# EAGLE board ATmega328P (EAGLE 9.5.2)
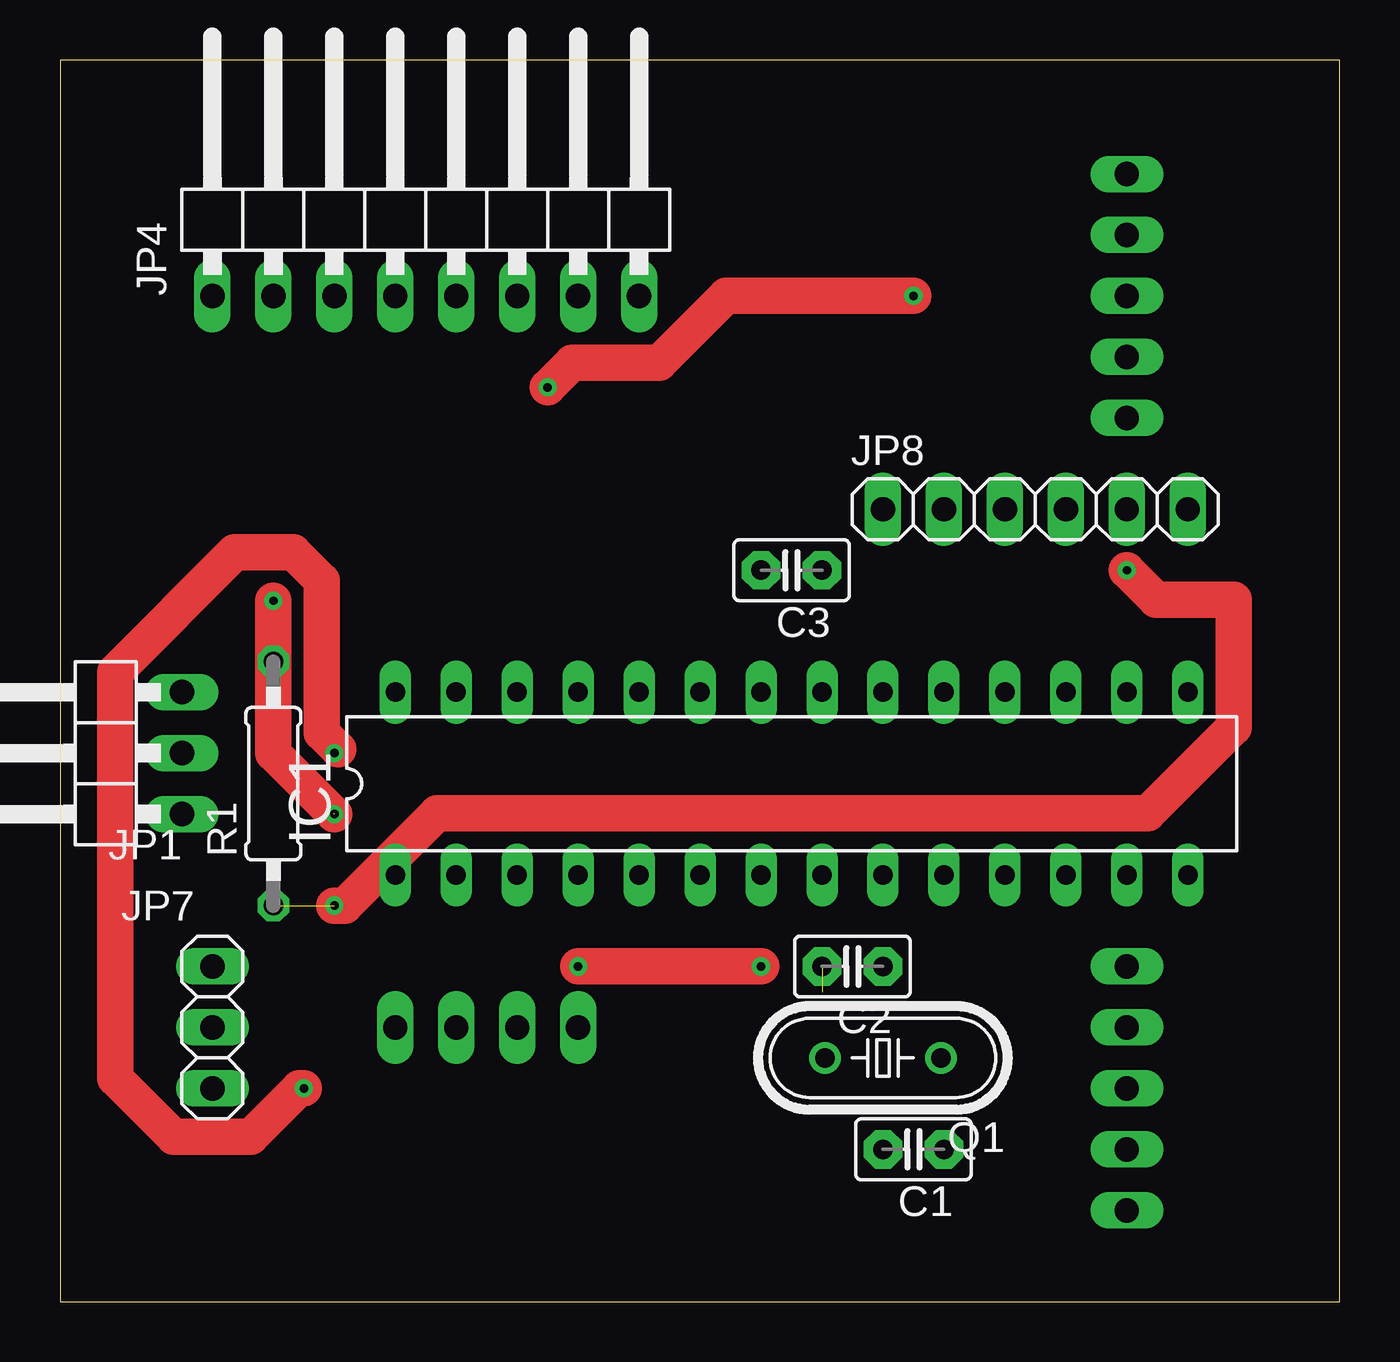
[diagram p0: board, top side]
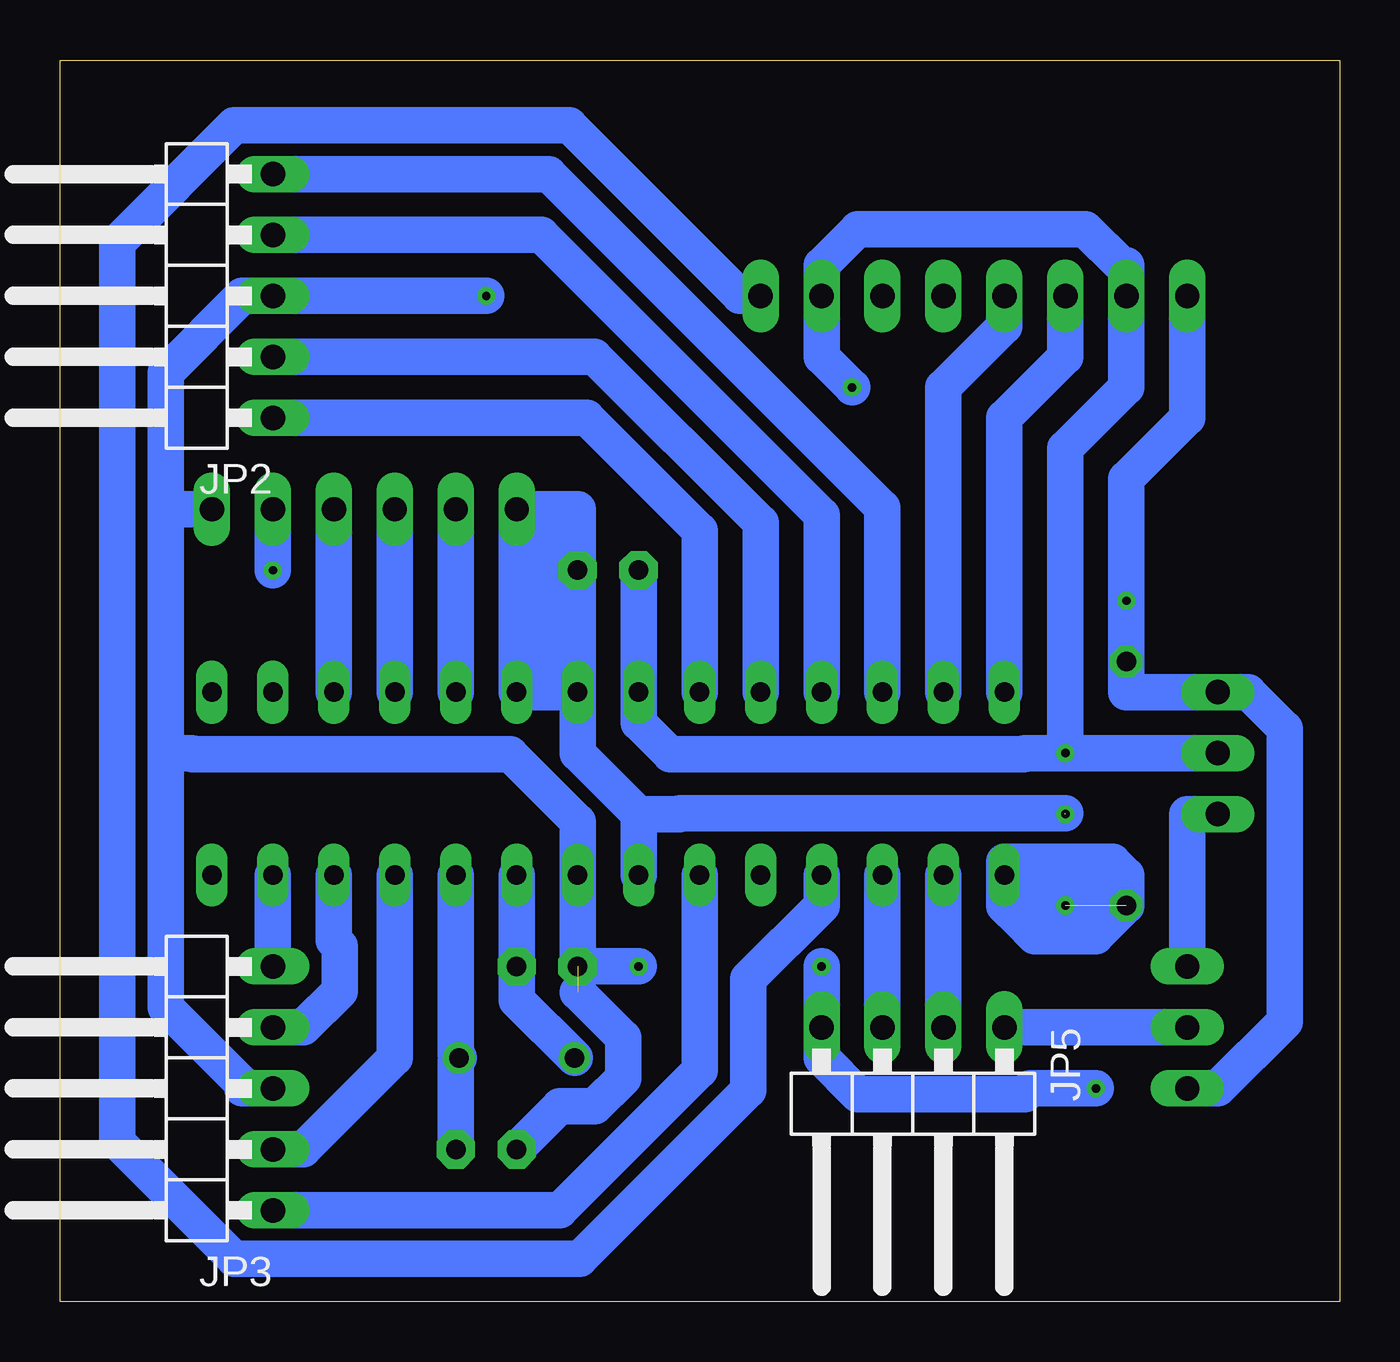
[diagram p1: board, bottom side, seen from below]

Size 53.32 x 51.74 mm. Coordinates in mm from the lower left corner, seen from the top.
Outline: 0,0 53.32,0 53.32,51.74 0,51.74 0,0
Copper layers (1*16): Top 0.035mm / dielectric 1.5mm / Bottom 0.035mm
Design rules "default *": minimum track width 6mil, minimum drill 0.35mm, track to track 0.5mm, track to pad 0.5mm, pad to pad 0.5mm, via to via 0.5mm, smd to smd 0.5mm, copper to edge 40mil, drill to drill 6mil, minimum pad ring 10mil, minimum via ring 8mil, stop-mask expansion 4mil, vias tented up to drill 0mil, thermal gap 10mil

## Footprints (pad centres in the part's own frame; a part is rotated, then mirrored left to right if it is on the bottom)
C2.5-2 = drill 0.813 pad 1.6 octagon: 1 -1.27,0; 2 1.27,0
DIL28-3 = drill 0.813 long: 1 -16.51,-3.81; 2 -13.97,-3.81; 3 -11.43,-3.81; 4 -8.89,-3.81; 5 -6.35,-3.81; 6 -3.81,-3.81; 7 -1.27,-3.81; 8 1.27,-3.81; 9 3.81,-3.81; 10 6.35,-3.81; 11 8.89,-3.81; 12 11.43,-3.81; 13 13.97,-3.81; 14 16.51,-3.81; 15 16.51,3.81; 16 13.97,3.81; 17 11.43,3.81; 18 8.89,3.81; 19 6.35,3.81; 20 3.81,3.81; 21 1.27,3.81; 22 -1.27,3.81; 23 -3.81,3.81; 24 -6.35,3.81; 25 -8.89,3.81; 26 -11.43,3.81; 27 -13.97,3.81; 28 -16.51,3.81
1X03/90 = drill 1.016 long: 1 -2.54,-3.81; 2 0,-3.81; 3 2.54,-3.81
1X05/90 = drill 1.016 long: 1 -5.08,-3.81; 2 -2.54,-3.81; 3 0,-3.81; 4 2.54,-3.81; 5 5.08,-3.81
1X08/90 = drill 1.016 long: 1 -8.89,-3.81; 2 -6.35,-3.81; 3 -3.81,-3.81; 4 -1.27,-3.81; 5 1.27,-3.81; 6 3.81,-3.81; 7 6.35,-3.81; 8 8.89,-3.81
1X04/90 = drill 1.016 long: 1 -3.81,-3.81; 2 -1.27,-3.81; 3 1.27,-3.81; 4 3.81,-3.81
1X03 = drill 1.016 long: 1 -2.54,0; 2 0,0; 3 2.54,0
1X06 = drill 1.016 long: 1 -6.35,0; 2 -3.81,0; 3 -1.27,0; 4 1.27,0; 5 3.81,0; 6 6.35,0
HC49/S = drill 0.813: 1 -2.413,0; 2 2.413,0
0207/10 = drill 0.813 octagon: 1 -5.08,0; 2 5.08,0

## Placement (x,y rotation side)
C1  22pF  [C2.5-2]  35.56,6.35 180 top
C2  22pF  [C2.5-2]  33.02,13.97 180 top
C3  [C2.5-2]  30.48,30.48 180 top
IC1  MEGA8-P  [DIL28-3]  30.48,21.59 0 top
JP1  [1X03/90]  1.27,22.86 90 top
JP2  [1X05/90]  48.26,41.91 90 bottom
JP3  [1X05/90]  48.26,8.89 90 bottom
JP4  [1X08/90]  15.24,45.72 0 top
JP5  [1X04/90]  17.78,7.62 180 bottom
JP7  [1X03]  6.35,11.43 270 top
JP8  [1X06]  40.64,33.02 0 top
Q1  16MHz  [HC49/S]  34.29,10.16 180 top
R1  10k  [0207/10]  8.89,21.59 90 top

## Library data of the parts
C1-C3 = capacitor-wima
IC1 = atmel; OC_FARNELL: unknown; OC_NEWARK: unknown
JP1-JP5 JP7 JP8 = pinhead
Q1 = crystal; OC_FARNELL: 1667008; OC_NEWARK: unknown
R1 = rcl; SPICEPREFIX: R

## Nets
3V3: JP1.1 JP7.1
5V: C3.1 IC1.7 IC1.20 IC1.21 JP1.3 JP4.1 JP7.3 JP8.1 R1.2
A1: IC1.23 JP2.1
A2: IC1.24 JP2.2
B1: IC1.25 JP2.4
B2: IC1.26 JP2.5
C1: IC1.6 JP3.1
C2: IC1.11 JP3.2
D1: IC1.12 JP3.4
D2: IC1.13 JP3.5
GND: C1.2 C2.2 C3.2 IC1.8 IC1.22 JP1.2 JP2.3 JP3.3 JP4.2 JP4.7 JP5.4 JP8.6
INT: IC1.4 JP4.8
N$1: C2.1 IC1.9 Q1.2
N$2: C1.1 IC1.10 Q1.1
N$3: JP5.1 JP7.2
N$4: IC1.18 JP8.3
N$7: IC1.17 JP8.4
N$8: IC1.19 JP8.2
N$9: IC1.1 JP8.5 R1.1
RX: IC1.2 JP5.2
SCL: IC1.28 JP4.3
SDA: IC1.27 JP4.4
TX: IC1.3 JP5.3
XCL: JP4.6
XDA: JP4.5

## Tracks (layer width: path | path; a pad name or v marks a point on that pad's centre or on a via)
3V3
  Bottom 1.524: JP1.1 6.35,20.32 JP7.1
5V  (via drill 0.35)  (1 unrouted)
  Top 1.524: v8.89,29.21 8.89,22.86 v11.43,20.32
  Bottom 1.524: 33.02,25.4 IC1.20 34.29,27.94 | 33.02,25.4 IC1.21 | C3.1 31.75,27.94 | 31.75,27.94 IC1.21 | 34.29,27.94 33.02,27.94 | 33.02,27.94 31.75,27.94 | 33.02,27.94 33.02,25.4 | 34.29,31.75 33.02,31.75 33.02,30.48 | 33.02,30.48 C3.1 | 34.29,27.94 34.29,31.75 | 34.29,31.75 JP8.1 31.75,33.02 C3.1 | 33.02,30.48 33.02,27.94 | IC1.21 31.75,22.86 29.21,20.32 | IC1.7 29.21,20.32 | JP4.1 6.35,36.83 8.89,34.29 v8.89,29.21 R1.2 8.89,25.4 JP1.3 3.81,25.4 2.29,23.88 2.29,11.68 5.08,8.89 JP7.3 | 29.21,20.32 27.51,20.32 27.47,20.36 11.43,20.36
A1
  Bottom 1.524: IC1.23 26.67,32.13 31.37,36.83 JP2.1
A2
  Bottom 1.524: IC1.24 24.13,32.45 31.05,39.37 JP2.2
B1
  Bottom 1.524: IC1.25 21.59,32.77 33.27,44.45 JP2.4
B2
  Bottom 1.524: IC1.26 19.05,33.09 32.95,46.99 JP2.5
C1
  Bottom 1.524: JP3.1 32.5,3.81 26.67,9.64 IC1.6
C2
  Bottom 1.524: JP3.2 43.18,6.35 39.37,10.16 IC1.11
D1
  Bottom 1.524: JP3.4 43.18,11.43 41.66,12.95 41.66,14.81 41.91,15.05 IC1.12
D2
  Bottom 1.524: IC1.13 JP3.5
GND  (via drill 0.35)  (1 unrouted)
  Top 1.524: 11.59,23.02 10.91,23.7 10.91,30.05 9.73,31.23 7.29,31.23 2.29,26.24 2.29,9.32 4.75,6.87 7.95,6.87 9.97,8.89 v10.16,8.89 | v20.32,38.1 21.34,39.12 24.97,39.12 27.75,41.91 v35.56,41.91 | v29.21,13.97 v21.59,13.97
  Bottom 1.524: C1.2 32.5,8.14 31.04,8.14 29.85,9.32 29.85,11 31.75,12.89 | C3.2 IC1.22 29.21,24.13 27.9,22.82 13.17,22.82 13.13,22.86 v11.43,22.86 | JP3.3 45.72,8.89 45.72,9.08 48.91,12.27 48.91,22.86 | 48.91,33.02 48.91,22.86 | JP8.6 48.91,33.02 | v11.43,22.86 JP1.2 | 48.91,33.02 48.91,38.72 45.72,41.91 JP2.3 v35.56,41.91 | 48.91,22.86 47.83,22.86 47.79,22.82 34.57,22.82 31.75,20 IC1.8 C2.2 v29.21,13.97 | v11.43,22.86 11.43,35.56 8.89,38.1 JP4.2 8.89,43.18 9.08,43.18 10.59,44.7 20.07,44.7 21.59,43.18 JP4.7 21.59,39.37 v20.32,38.1 | v10.16,8.89 12.89,8.89 13.13,8.64 20.07,8.64 21.59,10.16 JP5.4 v21.59,13.97
INT
  Bottom 1.524: IC1.4 21.59,16.51 24.65,13.45 24.65,8.8 31.66,1.79 46.05,1.79 50.94,6.67 50.94,44.13 46.05,49.01 32.11,49.01 25,41.91 JP4.8
N$1
  Bottom 1.524: IC1.9 C2.1 34.29,12.57 Q1.2
N$2
  Bottom 1.524: IC1.10 36.83,10.29 Q1.1 36.83,10.03 C1.1
N$3
  Bottom 1.524: JP5.1 JP7.2
N$4
  Bottom 1.524: JP8.3 IC1.18
N$7
  Bottom 1.524: JP8.4 IC1.17
N$8
  Bottom 1.524: JP8.2 IC1.19
N$9  (via drill 0.35)  (1 unrouted)
  Top 1.524: v11.43,16.51 11.86,16.51 15.71,20.36 45.33,20.36 48.91,23.94 48.91,29.25 45.68,29.25 v44.45,30.48
  Bottom 1.524: IC1.1 11.43,17.78 | 8.89,17.78 10.16,17.78 | 10.16,17.78 11.43,17.78 | 8.89,17.78 R1.1 10.16,15.24 | IC1.1 13.97,16.51 13.34,15.88 | IC1.1 13.97,18.34 9.45,18.34 8.89,17.78 | JP8.5 v44.45,30.48 | 10.16,15.24 11.43,15.24 | 11.43,15.24 12.7,15.24 13.34,15.88 | 13.34,15.88 12.7,15.88 12.7,16.51 11.43,17.78 | 11.43,17.78 11.43,15.24 | 10.16,17.78 10.16,15.24
RX
  Bottom 1.524: IC1.2 JP5.2
SCL
  Bottom 1.524: JP4.3 11.43,39.37 13.97,36.83 IC1.28
SDA
  Bottom 1.524: JP4.4 13.97,40.64 16.51,38.1 IC1.27
TX
  Bottom 1.524: IC1.3 JP5.3